# EAGLE board Model (EAGLE 9.7.0)

Size 151.37 x 87.06 mm. Coordinates in mm from the lower left corner, seen from the top.
Outline: 0,0 151.37,0 151.37,87.06 0,87.06 0,0
Copper layers (1*16): Top 0.035mm / dielectric 1.5mm / Bottom 0.035mm
Design rules "default": minimum track width 6mil, minimum drill 0.35mm, track to track 6mil, track to pad 6mil, pad to pad 6mil, via to via 6mil, smd to smd 6mil, copper to edge 40mil, drill to drill 6mil, minimum pad ring 10mil, minimum via ring 8mil, stop-mask expansion 4mil, vias tented up to drill 0mil, thermal gap 10mil

## Footprints (pad centres in the part's own frame; a part is rotated, then mirrored left to right if it is on the bottom)
HC-SR04 = drill 1.016 long: 1 -3.81,0; 2 -1.27,0; 3 1.27,0; 4 3.81,0
PIEZO = drill 1 pad 1.6: 1 -3.5,0; 2 3.5,0
SG90 = drill 1.016 long: 1 -2.54,0; 2 0,0; 3 2.54,0
ARDUINO-UNO-R3-SHIELD = drill 1.016 pad 1.88: 3.3V 24.13,-2.54; 5V 24.13,0; A0 24.13,12.7; A1 24.13,15.24; A2 24.13,17.78; A3 24.13,20.32; A4 24.13,22.86; A5 24.13,25.4; AREF -24.13,-13.97; D2 -24.13,20.32; D3 -24.13,17.78; D4 -24.13,15.24; D5 -24.13,12.7; D6 -24.13,10.16; D7 -24.13,7.62; D8 -24.13,3.81; D9 -24.13,1.27; D10 -24.13,-1.27; D11 -24.13,-3.81; D12 -24.13,-6.35; D13 -24.13,-8.89; GND@0 24.13,2.54; GND@1 24.13,5.08; GND@2 -24.13,-11.43; IOREF 24.13,-7.62; NC 24.13,-10.16; RES 24.13,-5.08; RX -24.13,25.4; SCL -24.13,-19.05; SDA -24.13,-16.51; TX -24.13,22.86; VIN 24.13,7.62

## Placement (x,y rotation side)
DISTSONIC  DISTANCE-SENSOR-4PINHC-SR04  [HC-SR04]  76.39,79.44 0 top
PIEZOSPEAKER  PIEZO  [PIEZO]  139.64,62.65 0 top
SERVOSERVO  SERVOSG90  [SG90]  7.06,16.61 0 top
USWITCH  ARDUINO-UNO-R3-SHIELD  [ARDUINO-UNO-R3-SHIELD]  63.76,29.84 270 top

## Library data of the parts
DISTSONIC PIEZOSPEAKER SERVOSERVO USWITCH = Tinkercad

## Nets
USWITCH_5V: DISTSONIC.1 SERVOSERVO.2 USWITCH.5V
USWITCH_D6: DISTSONIC.3 USWITCH.D6
USWITCH_D7: DISTSONIC.2 USWITCH.D7
USWITCH_D8: SERVOSERVO.3 USWITCH.D8
USWITCH_D9: PIEZOSPEAKER.1 USWITCH.D9
USWITCH_GND: DISTSONIC.4 PIEZOSPEAKER.2 SERVOSERVO.1 USWITCH.GND@0 USWITCH.GND@1 USWITCH.GND@2

## Tracks (layer width: path | path; a pad name or v marks a point on that pad's centre or on a via)
USWITCH_5V  (2 unrouted)
USWITCH_D6  (1 unrouted)
USWITCH_D7  (1 unrouted)
USWITCH_D8  (1 unrouted)
USWITCH_D9  (1 unrouted)
USWITCH_GND  (5 unrouted)